# EAGLE board UBW32_MX460_v262_Panel (EAGLE 7.4.0), part 1 of 4
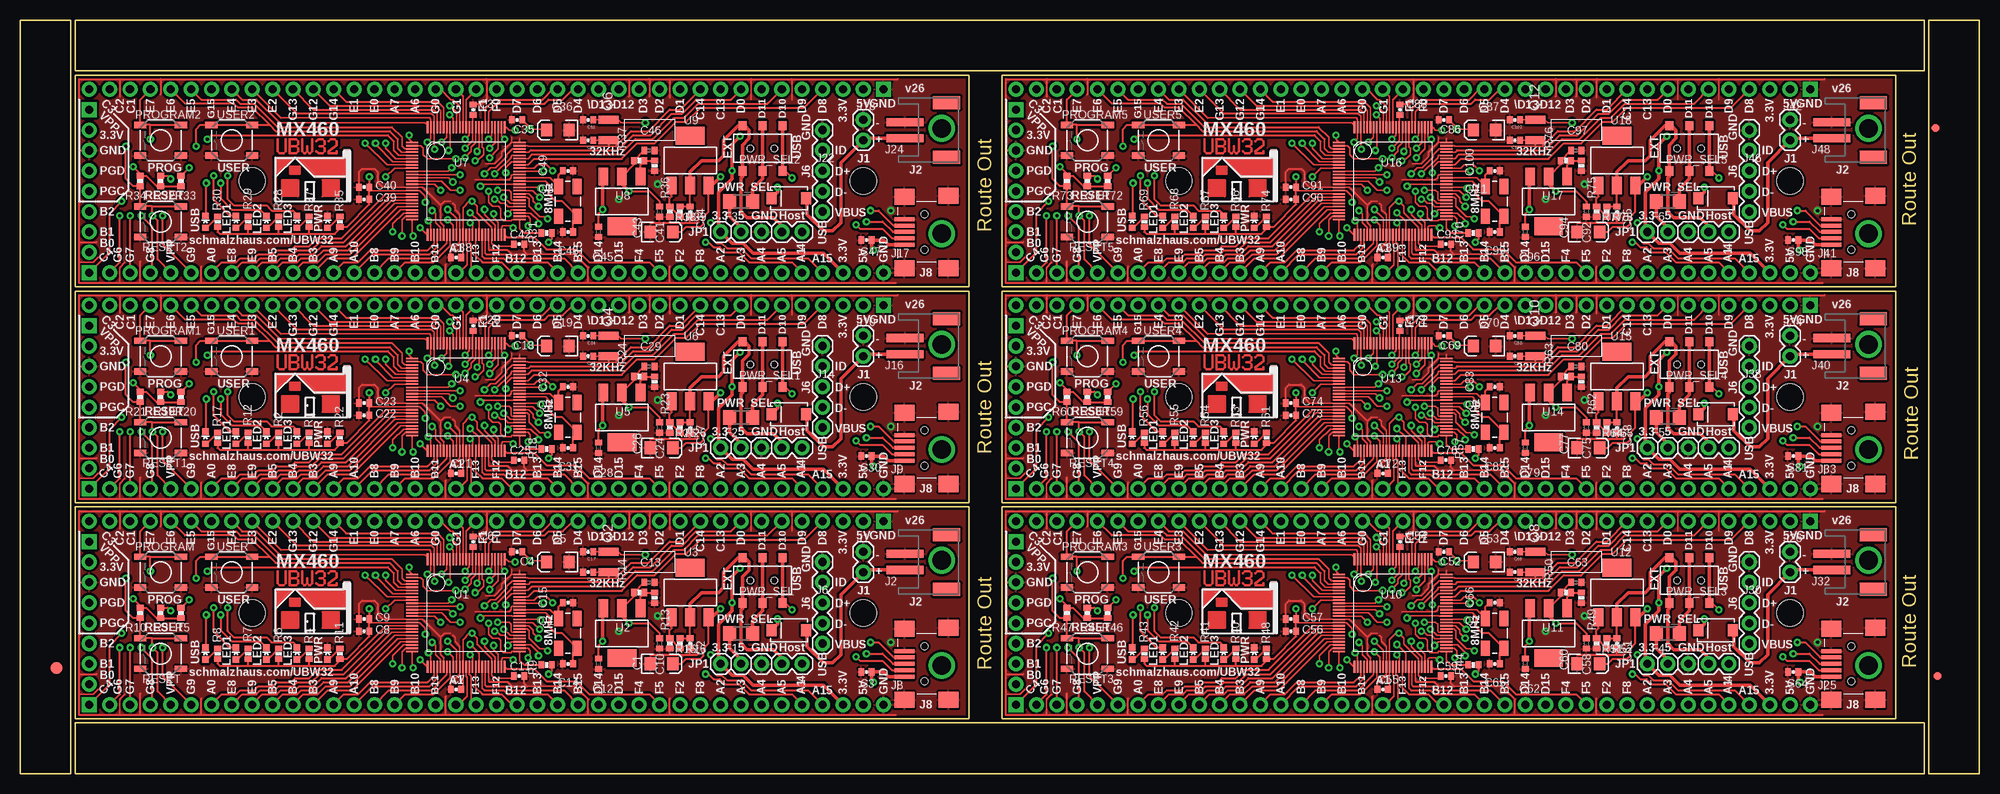
[diagram p0: board, top side]
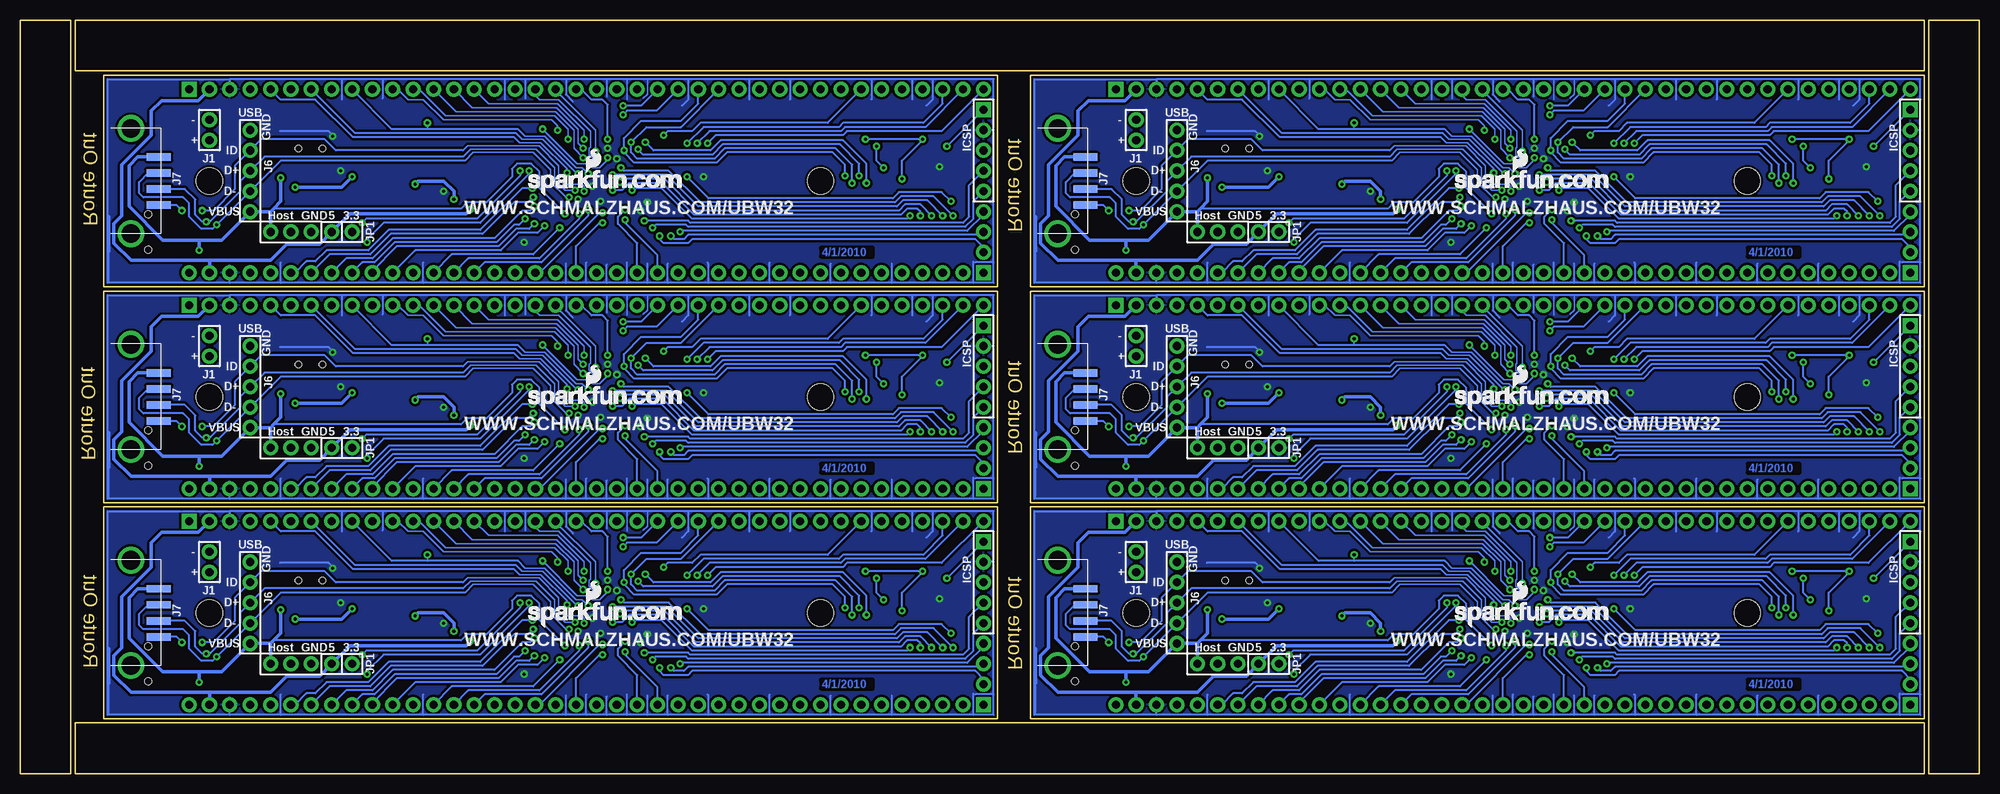
[diagram p1: board, bottom side, seen from below]

Size 244.35 x 93.98 mm. Coordinates in mm from the lower left corner, seen from the top.
Outline: 6.35,79.25 6.35,0 0,0 0,29.72
Outline: 0,27.18 0,93.98 6.35,93.98 6.35,76.71
Outline: 79.25,0 6.86,0 6.86,6.35 29.72,6.35
Outline: 27.18,6.35 237.49,6.35 237.49,0 76.71,0
Outline: 244.35,79.25 244.35,0 238,0 238,29.72
Outline: 238,27.18 238,93.98 244.35,93.98 244.35,76.71
Outline: 165.1,93.98 237.49,93.98 237.49,87.63 214.63,87.63
Outline: 217.17,87.63 6.86,87.63 6.86,93.98 167.64,93.98
Outline: 6.86,33.27 118.36,33.27 118.36,6.86 6.86,6.86 6.86,33.27
Outline: 6.86,60.2 118.36,60.2 118.36,33.78 6.86,33.78 6.86,60.2
Outline: 6.86,87.12 118.36,87.12 118.36,60.71 6.86,60.71 6.86,87.12
Outline: 122.43,33.27 233.93,33.27 233.93,6.86 122.43,6.86 122.43,33.27
Outline: 122.43,60.2 233.93,60.2 233.93,33.78 122.43,33.78 122.43,60.2
Outline: 122.43,87.12 233.93,87.12 233.93,60.71 122.43,60.71 122.43,87.12
Copper layers (1*16): Top 0.035mm / dielectric 1.5mm / Bottom 0.035mm
Design rules "SparkFun *": minimum track width 8mil, minimum drill 15mil, track to track 8mil, track to pad 8mil, pad to pad 8mil, via to via 8mil, smd to smd 8mil, copper to edge 8mil, drill to drill 8mil, minimum pad ring 12mil, minimum via ring 10mil, stop-mask expansion 4mil, vias tented up to drill 20mil, thermal gap 10mil

## Footprints (pad centres in the part's own frame; a part is rotated, then mirrored left to right if it is on the bottom)
1X01 = drill 1.016 pad 1.88: 1 0,0
EIA3216 = smd 1.4 x 1.6: A 1.4,0; C -1.4,0
0402-CAP = smd 0.7 x 0.9: 1 -0.65,0; 2 0.65,0
C0402 = smd 0.7 x 0.9: 1 -0.65,0; 2 0.65,0
SMA-DIODE = smd 1.27 x 1.47: A -2.15,0; C 2.15,0
FIDUCIAL-1.5X3 = smd 1.5 x 1.5: 1 0,0
FIDUCIAL-1X2 = smd 1 x 1: 1 0,0
R1206 = smd 1.6 x 1.803: 1 -1.422,0; 2 1.422,0
1X02 = drill 1.016 pad 1.88: 1 0,0; 2 2.54,0
S2B-PH = smd 1 x 4.6: 1 -1,-3.7; 2 1,-3.7 | smd 1.6 x 3.4: NC1 -3.4,1.5; NC2 3.4,1.5
1X40 = drill 1.016 pad 1.88 square: 1 -49.53,0 | drill 1.016 pad 1.88: 2 -46.99,0; 3 -44.45,0; 4 -41.91,0; 5 -39.37,0; 6 -36.83,0; 7 -34.29,0; 8 -31.75,0; 9 -29.21,0; 10 -26.67,0; 11 -24.13,0; 12 -21.59,0; 13 -19.05,0; 14 -16.51,0; 15 -13.97,0; 16 -11.43,0; 17 -8.89,0; 18 -6.35,0; 19 -3.81,0; 20 -1.27,0; 21 1.27,0; 22 3.81,0; 23 6.35,0; 24 8.89,0; 25 11.43,0; 26 13.97,0; 27 16.51,0; 28 19.05,0; 29 21.59,0; 30 24.13,0; 31 26.67,0; 32 29.21,0; 33 31.75,0; 34 34.29,0; 35 36.83,0; 36 39.37,0; 37 41.91,0; 38 44.45,0; 39 46.99,0; 40 49.53,0
1X08 = drill 1.016 pad 1.88 square: 1 0,0 | drill 1.016 pad 1.88: 2 2.54,0; 3 5.08,0; 4 7.62,0; 5 10.16,0; 6 12.7,0; 7 15.24,0; 8 17.78,0
1X05 = drill 1.016 pad 1.88: 1 0,0; 2 2.54,0; 3 5.08,0; 4 7.62,0; 5 10.16,0
USB-A-S = smd 3 x 0.9: D+ 3.45,-1; D- 3.45,1; GND 3.45,-3; VBUS 3.45,3 | drill 2.311: P$5 0,-6.566; P$6 0,6.566
USB-MINIB = smd 2.5 x 0.5: D+ 2.5,0; D- 2.5,0.8; GND 2.5,-1.6; ID 2.5,-0.8; VBUS 2.5,1.6 | smd 2.5 x 2: G1 -3,4.5; G2 2.5,4.5; G3 -3,-4.5; G4 2.5,-4.4 | hole 0.9: 0,2.2; 0,-2.2
LED-0603 = smd 0.8 x 0.8: A 0,-0.75; C 0,0.75
TACTILE_SWITCH_SMD = smd 1.524 x 0.762: 1 -2.54,1.905; 2 2.54,1.905; 3 -2.54,-1.905; 4 2.54,-1.905
AYZ0202 = smd 1 x 1.15: 1 -2.5,2.825; 2 0,2.825; 3 2.5,2.825; 4 -2.5,-2.825; 5 0,-2.825; 6 2.5,-2.825 | hole 0.85: 1.5,0; -1.5,0
CRYSTAL-SMD-5X3 = smd 1.9 x 1.1: 1 -1.85,-1.15; 2 1.85,-1.15; 3 1.85,1.15; 4 -1.85,1.15
CRYSTAL-32KHZ-SMD = smd 1 x 2.5: X1 -1.27,0; X2 1.27,0
0402-RES = smd 0.7 x 0.9: 1 -0.65,0; 2 0.65,0
TQFP100 = smd 0.2 x 1.5: 1 -4.8,-6.7; 2 -4.4,-6.7; 3 -4,-6.7; 4 -3.6,-6.7; 5 -3.2,-6.7; 6 -2.8,-6.7; 7 -2.4,-6.7; 8 -2,-6.7; 9 -1.6,-6.7; 10 -1.2,-6.7; 11 -0.8,-6.7; 12 -0.4,-6.7; 13 0,-6.7; 14 0.4,-6.7; 15 0.8,-6.7; 16 1.2,-6.7; 17 1.6,-6.7; 18 2,-6.7; 19 2.4,-6.7; 20 2.8,-6.7; 21 3.2,-6.7; 22 3.6,-6.7; 23 4,-6.7; 24 4.4,-6.7; 25 4.8,-6.7; 51 4.8,6.7; 52 4.4,6.7; 53 4,6.7; 54 3.6,6.7; 55 3.2,6.7; 56 2.8,6.7; 57 2.4,6.7; 58 2,6.7; 59 1.6,6.7; 60 1.2,6.7; 61 0.8,6.7; 62 0.4,6.7; 63 0,6.7; 64 -0.4,6.7; 65 -0.8,6.7; 66 -1.2,6.7; 67 -1.6,6.7; 68 -2,6.7; 69 -2.4,6.7; 70 -2.8,6.7; 71 -3.2,6.7; 72 -3.6,6.7; 73 -4,6.7; 74 -4.4,6.7; 75 -4.8,6.7 | smd 1.5 x 0.2: 26 6.7,-4.8; 27 6.7,-4.4; 28 6.7,-4; 29 6.7,-3.6; 30 6.7,-3.2; 31 6.7,-2.8; 32 6.7,-2.4; 33 6.7,-2; 34 6.7,-1.6; 35 6.7,-1.2; 36 6.7,-0.8; 37 6.7,-0.4; 38 6.7,0; 39 6.7,0.4; 40 6.7,0.8; 41 6.7,1.2; 42 6.7,1.6; 43 6.7,2; 44 6.7,2.4; 45 6.7,2.8; 46 6.7,3.2; 47 6.7,3.6; 48 6.7,4; 49 6.7,4.4; 50 6.7,4.8; 76 -6.7,4.8; 77 -6.7,4.4; 78 -6.7,4; 79 -6.7,3.6; 80 -6.7,3.2; 81 -6.7,2.8; 82 -6.7,2.4; 83 -6.7,2; 84 -6.7,1.6; 85 -6.7,1.2; 86 -6.7,0.8; 87 -6.7,0.4; 88 -6.7,0; 89 -6.7,-0.4; 90 -6.7,-0.8; 91 -6.7,-1.2; 92 -6.7,-1.6; 93 -6.7,-2; 94 -6.7,-2.4; 95 -6.7,-2.8; 96 -6.7,-3.2; 97 -6.7,-3.6; 98 -6.7,-4; 99 -6.7,-4.4; 100 -6.7,-4.8
SOT223 = smd 1.219 x 2.235: 1 -2.311,-3.099; 2 0,-3.099; 3 2.311,-3.099 | smd 3.6 x 2.2: 4 0,3.099
STAND-OFF = hole 3.302: 0,0

## Placement (x,y rotation side)
1  M01PTH  [1X01]  89.92,40.64 0 top
2  M01PTH  [1X01]  89.92,67.56 0 top
3  M01PTH  [1X01]  205.49,13.72 0 top
3.1  M01PTH  [1X01]  87.38,40.64 0 top
3.2  M01PTH  [1X01]  87.38,67.56 0 top
3.3  M01PTH  [1X01]  87.38,13.72 0 top
3.4  M01PTH  [1X01]  202.95,13.72 0 top
3.5  M01PTH  [1X01]  202.95,40.64 0 top
3.6  M01PTH  [1X01]  202.95,67.56 0 top
4  M01PTH  [1X01]  205.49,40.64 0 top
5  M01PTH  [1X01]  89.92,13.72 0 top
6  M01PTH  [1X01]  205.49,67.56 0 top
C1  10uF  [EIA3216]  80.01,13.72 0 top
C2  1uF  [0402-CAP]  83.57,16.26 270 top
C3  1uF  [0402-CAP]  105.54,12.7 180 top
C4  0.1uF  [0402-CAP]  61.98,27.69 180 top
C5  10uF  [EIA3216]  67.06,26.42 180 top
C6  0.1uF  [0402-CAP]  56.52,28.96 90 top
C7  0.1uF  [0402-CAP]  54.36,10.54 180 top
C8  0.1uF  [0402-CAP]  42.93,17.78 180 top
C9  0.1uF  [0402-CAP]  42.93,19.3 180 top
C10  0.1uF  [C0402]  79.76,16.26 270 top
C11  0.1uF  [0402-CAP]  62.23,12.19 0 top
C12  1uF  [C0402]  72.14,13.72 270 top
C13  1uF  [C0402]  78.49,23.88 0 top
C14  18pF  [0402-CAP]  68.33,13.72 0 top
C15  18pF  [0402-CAP]  68.33,21.34 180 top
C16  11pf  [0402-CAP]  70.87,25.15 180 top
C17  11pf  [0402-CAP]  70.87,27.69 180 top
C18  0.1uF  [0402-CAP]  61.98,54.61 180 top
C19  10uF  [EIA3216]  67.06,53.34 180 top
C20  0.1uF  [0402-CAP]  56.52,55.88 90 top
C21  0.1uF  [0402-CAP]  54.36,37.47 180 top
C22  0.1uF  [0402-CAP]  42.93,44.7 180 top
C23  0.1uF  [0402-CAP]  42.93,46.23 180 top
C24  0.1uF  [C0402]  79.76,43.18 270 top
C25  0.1uF  [0402-CAP]  62.23,39.12 0 top
C26  10uF  [EIA3216]  80.01,40.64 0 top
C27  1uF  [0402-CAP]  83.57,43.18 270 top
C28  1uF  [C0402]  72.14,40.64 270 top
C29  1uF  [C0402]  78.49,50.8 0 top
C30  1uF  [0402-CAP]  105.54,39.62 180 top
C31  18pF  [0402-CAP]  68.33,40.64 0 top
C32  18pF  [0402-CAP]  68.33,48.26 180 top
C33  11pf  [0402-CAP]  70.87,52.07 180 top
C34  11pf  [0402-CAP]  70.87,54.61 180 top
C35  0.1uF  [0402-CAP]  61.98,81.53 180 top
C36  10uF  [EIA3216]  67.06,80.26 180 top
C37  0.1uF  [0402-CAP]  56.52,82.8 90 top
C38  0.1uF  [0402-CAP]  54.36,64.39 180 top
C39  0.1uF  [0402-CAP]  42.93,71.63 180 top
C40  0.1uF  [0402-CAP]  42.93,73.15 180 top
C41  0.1uF  [C0402]  79.76,70.1 270 top
C42  0.1uF  [0402-CAP]  62.23,66.04 0 top
C43  10uF  [EIA3216]  80.01,67.56 0 top
C44  1uF  [0402-CAP]  83.57,70.1 270 top
C45  1uF  [C0402]  72.14,67.56 270 top
C46  1uF  [C0402]  78.49,77.72 0 top
C47  1uF  [0402-CAP]  105.54,66.55 180 top
C48  18pF  [0402-CAP]  68.33,67.56 0 top
C49  18pF  [0402-CAP]  68.33,75.18 180 top
C50  11pf  [0402-CAP]  70.87,78.99 180 top
C51  11pf  [0402-CAP]  70.87,81.53 180 top
C52  0.1uF  [0402-CAP]  177.55,27.69 180 top
C53  10uF  [EIA3216]  182.63,26.42 180 top
C54  0.1uF  [0402-CAP]  172.09,28.96 90 top
C55  0.1uF  [0402-CAP]  169.93,10.54 180 top
C56  0.1uF  [0402-CAP]  158.5,17.78 180 top
C57  0.1uF  [0402-CAP]  158.5,19.3 180 top
C58  0.1uF  [C0402]  195.33,16.26 270 top
C59  0.1uF  [0402-CAP]  177.8,12.19 0 top
C60  10uF  [EIA3216]  195.58,13.72 0 top
C61  1uF  [0402-CAP]  199.14,16.26 270 top
C62  1uF  [C0402]  187.71,13.72 270 top
C63  1uF  [C0402]  194.06,23.88 0 top
C64  1uF  [0402-CAP]  221.11,12.7 180 top
C65  18pF  [0402-CAP]  183.9,13.72 0 top
C66  18pF  [0402-CAP]  183.9,21.34 180 top
C67  11pf  [0402-CAP]  186.44,25.15 180 top
C68  11pf  [0402-CAP]  186.44,27.69 180 top
C69  0.1uF  [0402-CAP]  177.55,54.61 180 top
C70  10uF  [EIA3216]  182.63,53.34 180 top
C71  0.1uF  [0402-CAP]  172.09,55.88 90 top
C72  0.1uF  [0402-CAP]  169.93,37.47 180 top
C73  0.1uF  [0402-CAP]  158.5,44.7 180 top
C74  0.1uF  [0402-CAP]  158.5,46.23 180 top
C75  0.1uF  [C0402]  195.33,43.18 270 top
C76  0.1uF  [0402-CAP]  177.8,39.12 0 top
C77  10uF  [EIA3216]  195.58,40.64 0 top
C78  1uF  [0402-CAP]  199.14,43.18 270 top
C79  1uF  [C0402]  187.71,40.64 270 top
C80  1uF  [C0402]  194.06,50.8 0 top
C81  1uF  [0402-CAP]  221.11,39.62 180 top
C82  18pF  [0402-CAP]  183.9,40.64 0 top
C83  18pF  [0402-CAP]  183.9,48.26 180 top
C84  11pf  [0402-CAP]  186.44,52.07 180 top
C85  11pf  [0402-CAP]  186.44,54.61 180 top
C86  0.1uF  [0402-CAP]  177.55,81.53 180 top
C87  10uF  [EIA3216]  182.63,80.26 180 top
C88  0.1uF  [0402-CAP]  172.09,82.8 90 top
C89  0.1uF  [0402-CAP]  169.93,64.39 180 top
C90  0.1uF  [0402-CAP]  158.5,71.63 180 top
C91  0.1uF  [0402-CAP]  158.5,73.15 180 top
C92  0.1uF  [C0402]  195.33,70.1 270 top
C93  0.1uF  [0402-CAP]  177.8,66.04 0 top
C94  10uF  [EIA3216]  195.58,67.56 0 top
C95  1uF  [0402-CAP]  199.14,70.1 270 top
C96  1uF  [C0402]  187.71,67.56 270 top
C97  1uF  [C0402]  194.06,77.72 0 top
C98  1uF  [0402-CAP]  221.11,66.55 180 top
C99  18pF  [0402-CAP]  183.9,67.56 0 top
C100  18pF  [0402-CAP]  183.9,75.18 180 top
C101  11pf  [0402-CAP]  186.44,78.99 180 top
C102  11pf  [0402-CAP]  186.44,81.53 180 top
D1  [SMA-DIODE]  95.89,17.91 180 top
D2  [SMA-DIODE]  95.89,44.83 180 top
D3  [SMA-DIODE]  95.89,71.75 180 top
D4  [SMA-DIODE]  211.46,17.91 180 top
D5  [SMA-DIODE]  211.46,44.83 180 top
D6  [SMA-DIODE]  211.46,71.75 180 top
E$1  [FIDUCIAL-1.5X3]  4.57,13.21 0 top
E$5  [FIDUCIAL-1X2]  239.14,12.19 0 top
E$6  [FIDUCIAL-1X2]  238.89,80.52 180 top
F1  250mA PTC Fuse  [R1206]  89.92,17.53 180 top
F2  250mA PTC Fuse  [R1206]  89.92,44.45 180 top
F3  250mA PTC Fuse  [R1206]  89.92,71.37 180 top
F4  250mA PTC Fuse  [R1206]  205.49,17.53 180 top
F5  250mA PTC Fuse  [R1206]  205.49,44.45 180 top
F6  250mA PTC Fuse  [R1206]  205.49,71.37 180 top
GND  M01PTH  [1X01]  92.46,13.72 0 top
GND1  M01PTH  [1X01]  92.46,40.64 0 top
GND2  M01PTH  [1X01]  92.46,67.56 0 top
GND3  M01PTH  [1X01]  208.03,13.72 0 top
GND4  M01PTH  [1X01]  208.03,40.64 0 top
GND5  M01PTH  [1X01]  208.03,67.56 0 top
J1  [1X02]  105.16,27.69 270 top
J2  [S2B-PH]  114.05,26.42 270 top
J3  M40  [1X40]  58.17,31.5 180 top
J4  M40  [1X40]  58.17,8.64 0 top
J5  [1X08]  8.64,28.96 270 top
J6  [1X05]  100.08,16.26 90 top
J7  USB-A-S  [USB-A-S]  114.94,20.07 0 bottom
J8  [USB-MINIB]  112.78,13.72 180 top
J9  [USB-MINIB]  112.78,40.64 180 top
J10  [1X02]  105.16,54.61 270 top
J11  M40  [1X40]  58.17,58.42 180 top
J12  M40  [1X40]  58.17,35.56 0 top
J13  [1X08]  8.64,55.88 270 top
J14  [1X05]  100.08,43.18 90 top
J15  USB-A-S  [USB-A-S]  114.94,46.99 0 bottom
J16  [S2B-PH]  114.05,53.34 270 top
J17  [USB-MINIB]  112.78,67.56 180 top
J18  [1X02]  105.16,81.53 270 top
J19  M40  [1X40]  58.17,85.34 180 top
J20  M40  [1X40]  58.17,62.48 0 top
J21  [1X08]  8.64,82.8 270 top
J22  [1X05]  100.08,70.1 90 top
J23  USB-A-S  [USB-A-S]  114.94,73.91 0 bottom
J24  [S2B-PH]  114.05,80.26 270 top
J25  [USB-MINIB]  228.35,13.72 180 top
J26  [1X02]  220.73,27.69 270 top
J27  M40  [1X40]  173.74,31.5 180 top
J28  M40  [1X40]  173.74,8.64 0 top
J29  [1X08]  124.21,28.96 270 top
J30  [1X05]  215.65,16.26 90 top
J31  USB-A-S  [USB-A-S]  230.5,20.07 0 bottom
J32  [S2B-PH]  229.62,26.42 270 top
J33  [USB-MINIB]  228.35,40.64 180 top
J34  [1X02]  220.73,54.61 270 top
J35  M40  [1X40]  173.74,58.42 180 top
J36  M40  [1X40]  173.74,35.56 0 top
J37  [1X08]  124.21,55.88 270 top
J38  [1X05]  215.65,43.18 90 top
J39  USB-A-S  [USB-A-S]  230.5,46.99 0 bottom
J40  [S2B-PH]  229.62,53.34 270 top
J41  [USB-MINIB]  228.35,67.56 180 top
J42  [1X02]  220.73,81.53 270 top
J43  M40  [1X40]  173.74,85.34 180 top
J44  M40  [1X40]  173.74,62.48 0 top
J45  [1X08]  124.21,82.8 270 top
J46  [1X05]  215.65,70.1 90 top
J47  USB-A-S  [USB-A-S]  230.5,73.91 0 bottom
J48  [S2B-PH]  229.62,80.26 270 top
JP1  [1X02]  95,13.72 0 top
JP2  [1X02]  95,40.64 0 top
JP3  [1X02]  95,67.56 0 top
JP4  [1X02]  210.57,13.72 0 top
JP5  [1X02]  210.57,40.64 0 top
JP6  [1X02]  210.57,67.56 0 top
LED1  WHITE  [LED-0603]  26.92,14.99 0 top
LED2  RED  [LED-0603]  30.73,14.99 0 top
LED3  YELLOW  [LED-0603]  34.54,14.99 0 top
LED4  YELLOW  [LED-0603]  34.54,41.91 0 top
LED5  RED  [LED-0603]  30.73,41.91 0 top
LED6  WHITE  [LED-0603]  26.92,41.91 0 top
LED7  YELLOW  [LED-0603]  34.54,68.83 0 top
LED8  RED  [LED-0603]  30.73,68.83 0 top
LED9  WHITE  [LED-0603]  26.92,68.83 0 top
LED10  YELLOW  [LED-0603]  150.11,14.99 0 top
LED11  RED  [LED-0603]  146.3,14.99 0 top
LED12  WHITE  [LED-0603]  142.49,14.99 0 top
LED13  YELLOW  [LED-0603]  150.11,41.91 0 top
LED14  RED  [LED-0603]  146.3,41.91 0 top
LED15  WHITE  [LED-0603]  142.49,41.91 0 top
LED16  YELLOW  [LED-0603]  150.11,68.83 0 top
LED17  RED  [LED-0603]  146.3,68.83 0 top
LED18  WHITE  [LED-0603]  142.49,68.83 0 top
PROGRAM  [TACTILE_SWITCH_SMD]  17.53,25.15 180 top
PROGRAM1  [TACTILE_SWITCH_SMD]  17.53,52.07 180 top
PROGRAM2  [TACTILE_SWITCH_SMD]  17.53,78.99 180 top
PROGRAM3  [TACTILE_SWITCH_SMD]  133.1,25.15 180 top
PROGRAM4  [TACTILE_SWITCH_SMD]  133.1,52.07 180 top
PROGRAM5  [TACTILE_SWITCH_SMD]  133.1,78.99 180 top
PWR  BLUE  [LED-0603]  38.35,14.99 0 top
PWR1  BLUE  [LED-0603]  38.35,41.91 0 top
PWR2  BLUE  [LED-0603]  38.35,68.83 0 top
PWR3  BLUE  [LED-0603]  153.92,14.99 0 top
PWR4  BLUE  [LED-0603]  153.92,41.91 0 top
PWR5  BLUE  [LED-0603]  153.92,68.83 0 top
PWR_SEL  AYZ0202  [AYZ0202]  92.58,24.13 0 top
PWR_SEL1  AYZ0202  [AYZ0202]  92.58,51.05 0 top
PWR_SEL2  AYZ0202  [AYZ0202]  92.58,77.98 0 top
PWR_SEL3  AYZ0202  [AYZ0202]  208.15,24.13 0 top
PWR_SEL4  AYZ0202  [AYZ0202]  208.15,51.05 0 top
PWR_SEL5  AYZ0202  [AYZ0202]  208.15,77.98 0 top
Q1  8MHz  [CRYSTAL-SMD-5X3]  68.33,17.53 90 top
Q2  32.768KHz  [CRYSTAL-32KHZ-SMD]  73.41,26.42 270 top
Q3  8MHz  [CRYSTAL-SMD-5X3]  68.33,44.45 90 top
Q4  32.768KHz  [CRYSTAL-32KHZ-SMD]  73.41,53.34 270 top
Q5  8MHz  [CRYSTAL-SMD-5X3]  68.33,71.37 90 top
Q6  32.768KHz  [CRYSTAL-32KHZ-SMD]  73.41,80.26 270 top
Q7  8MHz  [CRYSTAL-SMD-5X3]  183.9,17.53 90 top
Q8  32.768KHz  [CRYSTAL-32KHZ-SMD]  188.98,26.42 270 top
Q9  8MHz  [CRYSTAL-SMD-5X3]  183.9,44.45 90 top
Q10  32.768KHz  [CRYSTAL-32KHZ-SMD]  188.98,53.34 270 top
Q11  8MHz  [CRYSTAL-SMD-5X3]  183.9,71.37 90 top
Q12  32.768KHz  [CRYSTAL-32KHZ-SMD]  188.98,80.26 270 top
R1  330  [0402-RES]  36.07,41.91 270 top
R2  330  [0402-RES]  32.26,41.91 270 top
R3  10K  [0402-RES]  17.53,20.07 90 top
R4  330  [0402-RES]  36.07,14.99 270 top
R5  10K  [0402-RES]  20.07,20.07 90 top
R6  330  [0402-RES]  32.26,14.99 270 top
R7  330  [0402-RES]  28.45,14.99 270 top
R8  330  [0402-RES]  24.64,14.99 270 top
R9  10K  [0402-RES]  65.66,13.59 0 top
R10  10K  [0402-RES]  14.99,20.07 270 top
R11  330  [0402-RES]  39.88,14.99 270 top
R12  330  [0402-RES]  28.45,41.91 270 top
R13  390  [0402-RES]  79.12,21.97 90 top
R14  240  [0402-RES]  77.22,22.61 0 top
R15  715  [0402-RES]  81.03,16.26 90 top
R16  240  [0402-RES]  82.3,16.26 270 top
R17  330  [0402-RES]  24.64,41.91 270 top
R18  10K  [0402-RES]  65.66,40.51 0 top
R19  10K  [0402-RES]  17.53,46.99 90 top
R20  10K  [0402-RES]  20.07,46.99 90 top
R21  10K  [0402-RES]  14.99,46.99 270 top
R22  330  [0402-RES]  39.88,41.91 270 top
R23  390  [0402-RES]  79.12,48.9 90 top
R24  240  [0402-RES]  77.22,49.53 0 top
R25  715  [0402-RES]  81.03,43.18 90 top
R26  240  [0402-RES]  82.3,43.18 270 top
R27  330  [0402-RES]  36.07,68.83 270 top
R28  330  [0402-RES]  32.26,68.83 270 top
R29  330  [0402-RES]  28.45,68.83 270 top
R30  330  [0402-RES]  24.64,68.83 270 top
R31  10K  [0402-RES]  65.66,67.44 0 top
R32  10K  [0402-RES]  17.53,73.91 90 top
R33  10K  [0402-RES]  20.07,73.91 90 top
R34  10K  [0402-RES]  14.99,73.91 270 top
R35  330  [0402-RES]  39.88,68.83 270 top
R36  390  [0402-RES]  79.12,75.82 90 top
R37  240  [0402-RES]  77.22,76.45 0 top
R38  715  [0402-RES]  81.03,70.1 90 top
R39  240  [0402-RES]  82.3,70.1 270 top
R40  330  [0402-RES]  151.64,14.99 270 top
R41  330  [0402-RES]  147.83,14.99 270 top
R42  330  [0402-RES]  144.02,14.99 270 top
R43  330  [0402-RES]  140.21,14.99 270 top
R44  10K  [0402-RES]  181.23,13.59 0 top
R45  10K  [0402-RES]  133.1,20.07 90 top
R46  10K  [0402-RES]  135.64,20.07 90 top
R47  10K  [0402-RES]  130.56,20.07 270 top
R48  330  [0402-RES]  155.45,14.99 270 top
R49  390  [0402-RES]  194.69,21.97 90 top
R50  240  [0402-RES]  192.79,22.61 0 top
R51  715  [0402-RES]  196.6,16.26 90 top
R52  240  [0402-RES]  197.87,16.26 270 top
R53  330  [0402-RES]  151.64,41.91 270 top
R54  330  [0402-RES]  147.83,41.91 270 top
R55  330  [0402-RES]  144.02,41.91 270 top
R56  330  [0402-RES]  140.21,41.91 270 top
R57  10K  [0402-RES]  181.23,40.51 0 top
R58  10K  [0402-RES]  133.1,46.99 90 top
R59  10K  [0402-RES]  135.64,46.99 90 top
R60  10K  [0402-RES]  130.56,46.99 270 top
R61  330  [0402-RES]  155.45,41.91 270 top
R62  390  [0402-RES]  194.69,48.9 90 top
R63  240  [0402-RES]  192.79,49.53 0 top
R64  715  [0402-RES]  196.6,43.18 90 top
R65  240  [0402-RES]  197.87,43.18 270 top
R66  330  [0402-RES]  151.64,68.83 270 top
R67  330  [0402-RES]  147.83,68.83 270 top
R68  330  [0402-RES]  144.02,68.83 270 top
R69  330  [0402-RES]  140.21,68.83 270 top
R70  10K  [0402-RES]  181.23,67.44 0 top
R71  10K  [0402-RES]  133.1,73.91 90 top
R72  10K  [0402-RES]  135.64,73.91 90 top
R73  10K  [0402-RES]  130.56,73.91 270 top
R74  330  [0402-RES]  155.45,68.83 270 top
R75  390  [0402-RES]  194.69,75.82 90 top
R76  240  [0402-RES]  192.79,76.45 0 top
R77  715  [0402-RES]  196.6,70.1 90 top
R78  240  [0402-RES]  197.87,70.1 270 top
RESET  [TACTILE_SWITCH_SMD]  17.53,14.99 180 top
RESET1  [TACTILE_SWITCH_SMD]  17.53,41.91 180 top
RESET2  [TACTILE_SWITCH_SMD]  17.53,68.83 180 top
RESET3  [TACTILE_SWITCH_SMD]  133.1,14.99 180 top
RESET4  [TACTILE_SWITCH_SMD]  133.1,41.91 180 top
RESET5  [TACTILE_SWITCH_SMD]  133.1,68.83 180 top
U1  PIC32MX460F512L TQFP100  [TQFP100]  55.63,20.07 270 top
U2  3.3V  [SOT223]  75.06,17.53 180 top
U3  5V  [SOT223]  83.57,22.61 0 top
U4  PIC32MX460F512L TQFP100  [TQFP100]  55.63,46.99 270 top
U5  3.3V  [SOT223]  75.06,44.45 180 top
U6  5V  [SOT223]  83.57,49.53 0 top
U7  PIC32MX460F512L TQFP100  [TQFP100]  55.63,73.91 270 top
U8  3.3V  [SOT223]  75.06,71.37 180 top
U9  5V  [SOT223]  83.57,76.45 0 top
U10  PIC32MX460F512L TQFP100  [TQFP100]  171.2,20.07 270 top
U11  3.3V  [SOT223]  190.63,17.53 180 top
U12  5V  [SOT223]  199.14,22.61 0 top
U13  PIC32MX460F512L TQFP100  [TQFP100]  171.2,46.99 270 top
U14  3.3V  [SOT223]  190.63,44.45 180 top
U15  5V  [SOT223]  199.14,49.53 0 top
U16  PIC32MX460F512L TQFP100  [TQFP100]  171.2,73.91 270 top
U17  3.3V  [SOT223]  190.63,71.37 180 top
U18  5V  [SOT223]  199.14,76.45 0 top
U$1  STAND-OFF  [STAND-OFF]  105.16,46.99 0 top
U$2  STAND-OFF  [STAND-OFF]  28.96,46.99 0 top
U$3  [UBW32]  36.45,24.77 0 top
U$4  LOGO-SFENEW  [SFE-NEW-WEBLOGO]  65.41,18.29 0 bottom
U$5  [SCHMALZHAUS]  35.69,20.07 0 top
U$6  STAND-OFF  [STAND-OFF]  105.16,20.07 0 top
U$7  STAND-OFF  [STAND-OFF]  28.96,20.07 0 top
U$8  LOGO-SFENEW  [SFE-NEW-WEBLOGO]  65.41,45.21 0 bottom
U$9  [UBW32]  36.45,51.69 0 top
U$10  [SCHMALZHAUS]  35.69,46.99 0 top
U$11  STAND-OFF  [STAND-OFF]  105.16,73.91 0 top
U$12  STAND-OFF  [STAND-OFF]  28.96,73.91 0 top
U$13  LOGO-SFENEW  [SFE-NEW-WEBLOGO]  65.41,72.14 0 bottom
U$14  [UBW32]  36.45,78.61 0 top
U$15  [SCHMALZHAUS]  35.69,73.91 0 top
U$16  STAND-OFF  [STAND-OFF]  220.73,20.07 0 top
U$17  STAND-OFF  [STAND-OFF]  144.53,20.07 0 top
U$18  LOGO-SFENEW  [SFE-NEW-WEBLOGO]  180.97,18.29 0 bottom
U$19  [UBW32]  152.02,24.77 0 top
U$20  [SCHMALZHAUS]  151.26,20.07 0 top
U$21  STAND-OFF  [STAND-OFF]  220.73,46.99 0 top
U$22  STAND-OFF  [STAND-OFF]  144.53,46.99 0 top
U$23  LOGO-SFENEW  [SFE-NEW-WEBLOGO]  180.97,45.21 0 bottom
U$24  [UBW32]  152.02,51.69 0 top
U$25  [SCHMALZHAUS]  151.26,46.99 0 top
U$26  STAND-OFF  [STAND-OFF]  220.73,73.91 0 top
U$27  STAND-OFF  [STAND-OFF]  144.53,73.91 0 top
U$28  LOGO-SFENEW  [SFE-NEW-WEBLOGO]  180.97,72.14 0 bottom
U$29  [UBW32]  152.02,78.61 0 top
U$30  [SCHMALZHAUS]  151.26,73.91 0 top
USB  GREEN  [LED-0603]  23.11,14.99 0 top
USB1  GREEN  [LED-0603]  23.11,41.91 0 top
USB2  GREEN  [LED-0603]  23.11,68.83 0 top
USB3  GREEN  [LED-0603]  138.68,14.99 0 top
USB4  GREEN  [LED-0603]  138.68,41.91 0 top
USB5  GREEN  [LED-0603]  138.68,68.83 0 top
USER  [TACTILE_SWITCH_SMD]  26.42,25.15 180 top
USER1  [TACTILE_SWITCH_SMD]  26.42,52.07 180 top
USER2  [TACTILE_SWITCH_SMD]  26.42,78.99 180 top
USER3  [TACTILE_SWITCH_SMD]  141.99,25.15 180 top
USER4  [TACTILE_SWITCH_SMD]  141.99,52.07 180 top
USER5  [TACTILE_SWITCH_SMD]  141.99,78.99 180 top

## Library data of the parts
1-3 3.1-3.6 4-6 D1-D6 GND GND1-GND5 J1 J6 J10 J14 J18 J22 J26 J30 J34 J38 J42 J46 JP1-JP6 = SparkFun-12-01-09
C1 C5 C10 C12 C13 C19 C24 C26 C28 C29 C36 C41 C43 C45 C46 C53 C58 C60 C62 C63 C70 C75 C77 C79 C80 C87 C92 C94 C96 C97 J7-J9 J15 J17 J23 J25 J31 J33 J39 J41 J47 PROGRAM PROGRAM1-PROGRAM5 PWR_SEL PWR_SEL1-PWR_SEL5 RESET RESET1-RESET5 U$1 U$2 U$4 U$6-U$8 U$11-U$13 U$16-U$18 U$21-U$23 U$26-U$28 USER USER1-USER5 = SparkFun02-20-08
C2-C4 C6-C9 C11 C14-C18 C20-C23 C25 C27 C30-C35 C37-C40 C42 C44 C47-C52 C54-C57 C59 C61 C64-C69 C71-C74 C76 C78 C81-C86 C88-C91 C93 C95 C98-C102 J2 J16 J24 J32 J40 J48 LED1-LED18 PWR PWR1-PWR5 R1-R78 U2 U3 U5 U6 U8 U9 U11 U12 U14 U15 U17 U18 USB USB1-USB5 = SparkFun
E$1 = SparkFun-Retired
E$5 E$6 = SparkFun-Aesthetics
F1-F6 = resistor
J3-J5 J11-J13 J19-J21 J27-J29 J35-J37 J43-J45 Q2 Q4 Q6 Q8 Q10 Q12 U1 U4 U7 U10 U13 U16 = SchmalzHaus
Q1 Q3 Q5 Q7 Q9 Q11 = SparkFun11_03_09
U$3 U$5 U$9 U$10 U$14 U$15 U$19 U$20 U$24 U$25 U$29 U$30 = UBW32

## Nets
3.3V: 3.3.1 C6.1 C7.1 C8.1 C9.1 C10.1 C11.1 C13.1 J3.3 J4.38 J5.2 R3.1 R4.2 R5.1 R6.2 R7.2 R8.2 R9.2 R10.1 R11.2 R14.1 U1.2 U1.16 U1.30 U1.37 U1.46 U1.55 U1.62 U1.86 U2.2
3.3V1: 3.1.1 C20.1 C21.1 C22.1 C23.1 C24.1 C25.1 C29.1 J11.3 J12.38 J13.2 R1.2 R2.2 R12.2 R17.2 R18.2 R19.1 R20.1 R21.1 R22.2 R24.1 U4.2 U4.16 U4.30 U4.37 U4.46 U4.55 U4.62 U4.86 U5.2
3.3V2: 3.2.1 C37.1 C38.1 C39.1 C40.1 C41.1 C42.1 C46.1 J19.3 J20.38 J21.2 R27.2 R28.2 R29.2 R30.2 R31.2 R32.1 R33.1 R34.1 R35.2 R37.1 U7.2 U7.16 U7.30 U7.37 U7.46 U7.55 U7.62 U7.86 U8.2
3.3V3: 3.4.1 C54.1 C55.1 C56.1 C57.1 C58.1 C59.1 C63.1 J27.3 J28.38 J29.2 R40.2 R41.2 R42.2 R43.2 R44.2 R45.1 R46.1 R47.1 R48.2 R50.1 U10.2 U10.16 U10.30 U10.37 U10.46 U10.55 U10.62 U10.86 U11.2
3.3V4: 3.5.1 C71.1 C72.1 C73.1 C74.1 C75.1 C76.1 C80.1 J35.3 J36.38 J37.2 R53.2 R54.2 R55.2 R56.2 R57.2 R58.1 R59.1 R60.1 R61.2 R63.1 U13.2 U13.16 U13.30 U13.37 U13.46 U13.55 U13.62 U13.86 U14.2
3.3V5: 3.6.1 C88.1 C89.1 C90.1 C91.1 C92.1 C93.1 C97.1 J43.3 J44.38 J45.2 R66.2 R67.2 R68.2 R69.2 R70.2 R71.1 R72.1 R73.1 R74.2 R76.1 U16.2 U16.16 U16.30 U16.37 U16.46 U16.55 U16.62 U16.86 U17.2
5V: 5.1 C12.1 F1.2 J3.2 J4.39 U2.3
5V1: 1.1 C28.1 F2.2 J11.2 J12.39 U5.3
5V2: 2.1 C45.1 F3.2 J19.2 J20.39 U8.3
5V3: 3.1 C62.1 F4.2 J27.2 J28.39 U11.3
5V4: 4.1 C79.1 F5.2 J35.2 J36.39 U14.3
5V5: 6.1 C96.1 F6.2 J43.2 J44.39 U17.3
5V_ALT: C2.1 JP1.1 PWR_SEL.1 PWR_SEL.4 R16.1 U3.2
5V_ALT1: C27.1 JP2.1 PWR_SEL1.1 PWR_SEL1.4 R26.1 U6.2
5V_ALT2: C44.1 JP3.1 PWR_SEL2.1 PWR_SEL2.4 R39.1 U9.2
5V_ALT3: C61.1 JP4.1 PWR_SEL3.1 PWR_SEL3.4 R52.1 U12.2
5V_ALT4: C78.1 JP5.1 PWR_SEL4.1 PWR_SEL4.4 R65.1 U15.2
5V_ALT5: C95.1 JP6.1 PWR_SEL5.1 PWR_SEL5.4 R78.1 U18.2
D+: J6.3 J7.D+ J8.D+ U1.57
D+1: J9.D+ J14.3 J15.D+ U4.57
D+2: J17.D+ J22.3 J23.D+ U7.57
D+3: J25.D+ J30.3 J31.D+ U10.57
D+4: J33.D+ J38.3 J39.D+ U13.57
D+5: J41.D+ J46.3 J47.D+ U16.57
D-: J6.2 J7.D- J8.D- U1.56
D-1: J9.D- J14.2 J15.D- U4.56
D-2: J17.D- J22.2 J23.D- U7.56
D-3: J25.D- J30.2 J31.D- U10.56
D-4: J33.D- J38.2 J39.D- U13.56
D-5: J41.D- J46.2 J47.D- U16.56
GND: C1.C C2.2 C3.2 C4.2 C5.C C6.2 C7.2 C8.2 C9.2 C10.2 C11.2 C12.2 C13.2 C14.1 C15.1 C16.2 C17.2 GND.1 J1.1 J2.1 J3.1 J4.40 J5.3 J6.5 J7.GND J8.G1 J8.G2 J8.G3 J8.G4 J8.GND PROGRAM.1 PROGRAM.2 PWR.C R13.1 R15.1 RESET.1 RESET.2 U1.15 U1.31 U1.36 U1.45 U1.65 U1.75 USER.1 USER.2
GND1: C18.2 C19.C C20.2 C21.2 C22.2 C23.2 C24.2 C25.2 C26.C C27.2 C28.2 C29.2 C30.2 C31.1 C32.1 C33.2 C34.2 GND1.1 J9.G1 J9.G2 J9.G3 J9.G4 J9.GND J10.1 J11.1 J12.40 J13.3 J14.5 J15.GND J16.1 PROGRAM1.1 PROGRAM1.2 PWR1.C R23.1 R25.1 RESET1.1 RESET1.2 U4.15 U4.31 U4.36 U4.45 U4.65 U4.75 USER1.1 USER1.2
GND2: C35.2 C36.C C37.2 C38.2 C39.2 C40.2 C41.2 C42.2 C43.C C44.2 C45.2 C46.2 C47.2 C48.1 C49.1 C50.2 C51.2 GND2.1 J17.G1 J17.G2 J17.G3 J17.G4 J17.GND J18.1 J19.1 J20.40 J21.3 J22.5 J23.GND J24.1 PROGRAM2.1 PROGRAM2.2 PWR2.C R36.1 R38.1 RESET2.1 RESET2.2 U7.15 U7.31 U7.36 U7.45 U7.65 U7.75 USER2.1 USER2.2
GND3: C52.2 C53.C C54.2 C55.2 C56.2 C57.2 C58.2 C59.2 C60.C C61.2 C62.2 C63.2 C64.2 C65.1 C66.1 C67.2 C68.2 GND3.1 J25.G1 J25.G2 J25.G3 J25.G4 J25.GND J26.1 J27.1 J28.40 J29.3 J30.5 J31.GND J32.1 PROGRAM3.1 PROGRAM3.2 PWR3.C R49.1 R51.1 RESET3.1 RESET3.2 U10.15 U10.31 U10.36 U10.45 U10.65 U10.75 USER3.1 USER3.2
GND4: C69.2 C70.C C71.2 C72.2 C73.2 C74.2 C75.2 C76.2 C77.C C78.2 C79.2 C80.2 C81.2 C82.1 C83.1 C84.2 C85.2 GND4.1 J33.G1 J33.G2 J33.G3 J33.G4 J33.GND J34.1 J35.1 J36.40 J37.3 J38.5 J39.GND J40.1 PROGRAM4.1 PROGRAM4.2 PWR4.C R62.1 R64.1 RESET4.1 RESET4.2 U13.15 U13.31 U13.36 U13.45 U13.65 U13.75 USER4.1 USER4.2
GND5: C86.2 C87.C C88.2 C89.2 C90.2 C91.2 C92.2 C93.2 C94.C C95.2 C96.2 C97.2 C98.2 C99.1 C100.1 C101.2 C102.2 GND5.1 J41.G1 J41.G2 J41.G3 J41.G4 J41.GND J42.1 J43.1 J44.40 J45.3 J46.5 J47.GND J48.1 PROGRAM5.1 PROGRAM5.2 PWR5.C R75.1 R77.1 RESET5.1 RESET5.2 U16.15 U16.31 U16.36 U16.45 U16.65 U16.75 USER5.1 USER5.2
N$1: D1.A J1.2 J2.2
N$2: F1.1 PWR_SEL.2 PWR_SEL.5
N$3: R13.2 R14.2 U2.1
N$4: R15.2 R16.2 U3.1
N$5: C18.1 C19.A U4.85
N$6: PWR.A R11.1
N$7: R17.1 USB1.A
N$8: LED6.A R12.1
N$9: LED5.A R2.1
N$10: LED4.A R1.1
N$11: PWR1.A R22.1
N$12: D2.A J10.2 J16.2
N$13: F2.1 PWR_SEL1.2 PWR_SEL1.5
N$14: R23.2 R24.2 U5.1
N$15: R25.2 R26.2 U6.1
N$16: C35.1 C36.A U7.85
N$17: R30.1 USB2.A
N$18: LED9.A R29.1
N$19: LED8.A R28.1
N$20: R8.1 USB.A
N$21: LED7.A R27.1
N$22: LED1.A R7.1
N$23: LED2.A R6.1
N$24: PWR2.A R35.1
N$25: D3.A J18.2 J24.2
N$26: F3.1 PWR_SEL2.2 PWR_SEL2.5
N$27: R36.2 R37.2 U8.1
N$28: R38.2 R39.2 U9.1
N$29: C52.1 C53.A U10.85
N$30: R43.1 USB3.A
N$31: LED12.A R42.1
N$32: LED11.A R41.1
N$33: LED10.A R40.1
N$34: PWR3.A R48.1
N$35: LED3.A R4.1
N$36: D4.A J26.2 J32.2
N$37: F4.1 PWR_SEL3.2 PWR_SEL3.5
N$38: R49.2 R50.2 U11.1
N$39: R51.2 R52.2 U12.1
N$40: C69.1 C70.A U13.85
N$41: R56.1 USB4.A
N$42: LED15.A R55.1
N$43: LED14.A R54.1
N$44: LED13.A R53.1
N$45: PWR4.A R61.1
N$46: D5.A J34.2 J40.2
N$47: F5.1 PWR_SEL4.2 PWR_SEL4.5
N$48: R62.2 R63.2 U14.1
N$49: R64.2 R65.2 U15.1
N$50: C86.1 C87.A U16.85
N$51: R69.1 USB5.A
N$52: LED18.A R68.1
N$53: LED17.A R67.1
N$54: LED16.A R66.1
N$55: PWR5.A R74.1
N$56: D6.A J42.2 J48.2
N$57: F6.1 PWR_SEL5.2 PWR_SEL5.5
N$58: R75.2 R76.2 U17.1
N$59: R77.2 R78.2 U18.1
N$110: C4.1 C5.A U1.85
OSC1: C14.2 Q1.1 U1.63
OSC2: C15.2 Q1.3 U1.64
OSC3: C32.2 Q3.3 U4.64
OSC4: C31.2 Q3.1 U4.63
OSC5: C49.2 Q5.3 U7.64
OSC6: C48.2 Q5.1 U7.63
OSC7: C66.2 Q7.3 U10.64
OSC8: C65.2 Q7.1 U10.63
OSC9: C83.2 Q9.3 U13.64
OSC10: C82.2 Q9.1 U13.63
OSC11: C100.2 Q11.3 U16.64
OSC12: C99.2 Q11.1 U16.63
PGC: J5.5 U1.26
PGC1: J13.5 U4.26
PGC2: J21.5 U7.26
PGC3: J29.5 U10.26
PGC4: J37.5 U13.26
PGC5: J45.5 U16.26
PGD: J5.4 U1.27
PGD1: J13.4 U4.27
PGD2: J21.4 U7.27
PGD3: J29.4 U10.27
PGD4: J37.4 U13.27
PGD5: J45.4 U16.27
RA0: J4.7 U1.17
RA1: J4.19 U1.38
RA2: J4.32 U1.58
RA3: J4.33 U1.59
RA4: J4.34 U1.60
RA5: J4.35 U1.61
RA6: J3.24 U1.91
RA7: J3.25 U1.92
RA8: J12.32 U4.58
RA9: J4.13 U1.28
RA10: J4.14 U1.29
RA11: J12.33 U4.59
RA12: J11.24 U4.91
RA13: J11.25 U4.92
RA14: J4.36 U1.66
RA15: J4.37 U1.67
RA16: J12.34 U4.60
RA17: J12.35 U4.61
RA18: J12.7 U4.17
RA19: J12.13 U4.28
RA20: J12.14 U4.29
RA21: J12.19 U4.38
RA22: J12.36 U4.66
RA23: J12.37 U4.67
RA24: J20.32 U7.58
RA25: J20.33 U7.59
RA26: J19.24 U7.91
RA27: J19.25 U7.92
RA28: J20.34 U7.60
RA29: J20.35 U7.61
RA30: J20.7 U7.17
RA31: J20.13 U7.28
RA32: J20.14 U7.29
RA33: J20.19 U7.38
RA34: J20.36 U7.66
RA35: J20.37 U7.67
RA36: J28.32 U10.58
RA37: J28.33 U10.59
RA38: J27.24 U10.91
RA39: J27.25 U10.92
RA40: J28.34 U10.60
RA41: J28.35 U10.61
RA42: J28.7 U10.17
RA43: J28.13 U10.28
RA44: J28.14 U10.29
RA45: J28.19 U10.38
RA46: J28.36 U10.66
RA47: J28.37 U10.67
RA48: J36.32 U13.58
RA49: J36.33 U13.59
RA50: J35.24 U13.91
RA51: J35.25 U13.92
RA52: J36.34 U13.60
RA53: J36.35 U13.61
RA54: J36.7 U13.17
RA55: J36.13 U13.28
RA56: J36.14 U13.29
RA57: J36.19 U13.38
RA58: J36.36 U13.66
RA59: J36.37 U13.67
RA60: J44.32 U16.58
RA61: J44.33 U16.59
RA62: J43.24 U16.91
RA63: J43.25 U16.92
RA64: J44.34 U16.60
RA65: J44.35 U16.61
RA66: J44.7 U16.17
RA67: J44.13 U16.28
RA68: J44.14 U16.29
RA69: J44.19 U16.38
RA70: J44.36 U16.66
RA71: J44.37 U16.67
RB0: J5.8 U1.25
RB1: J5.7 U1.24
RB2: J5.6 U1.23
RB3: J4.12 U1.22
RB4: J4.11 U1.21
RB5: J4.10 U1.20
RB6: J13.8 U4.25
RB7: J13.7 U4.24
RB8: J4.15 U1.32
RB9: J4.16 U1.33
RB10: J4.17 U1.34
RB11: J4.18 U1.35
RB12: J4.22 U1.41
RB13: J4.23 U1.42
RB14: J4.24 U1.43
RB15: J4.25 U1.44
RB16: J12.10 U4.20
RB17: J12.11 U4.21
RB18: J12.12 U4.22
RB19: J13.6 U4.23
RB20: J12.15 U4.32
RB21: J12.16 U4.33
RB22: J12.17 U4.34
RB23: J12.18 U4.35
RB24: J12.22 U4.41
RB25: J12.23 U4.42
RB26: J12.24 U4.43
RB27: J12.25 U4.44
RB28: J21.8 U7.25
RB29: J21.7 U7.24
RB30: J20.10 U7.20
RB31: J20.11 U7.21
RB32: J20.12 U7.22
RB33: J21.6 U7.23
RB34: J20.15 U7.32
RB35: J20.16 U7.33
RB36: J20.17 U7.34
RB37: J20.18 U7.35
RB38: J20.22 U7.41
RB39: J20.23 U7.42
RB40: J20.24 U7.43
RB41: J20.25 U7.44
RB42: J29.8 U10.25
RB43: J29.7 U10.24
RB44: J28.10 U10.20
RB45: J28.11 U10.21
RB46: J28.12 U10.22
RB47: J29.6 U10.23
RB48: J28.15 U10.32
RB49: J28.16 U10.33
RB50: J28.17 U10.34
RB51: J28.18 U10.35
RB52: J28.22 U10.41
RB53: J28.23 U10.42
RB54: J28.24 U10.43
RB55: J28.25 U10.44
RB56: J37.8 U13.25
RB57: J37.7 U13.24
RB58: J36.10 U13.20
RB59: J36.11 U13.21
RB60: J36.12 U13.22
RB61: J37.6 U13.23
RB62: J36.15 U13.32
RB63: J36.16 U13.33
RB64: J36.17 U13.34
RB65: J36.18 U13.35
RB66: J36.22 U13.41
RB67: J36.23 U13.42
RB68: J36.24 U13.43
RB69: J36.25 U13.44
RB70: J45.8 U16.25
RB71: J45.7 U16.24
RB72: J44.10 U16.20
RB73: J44.11 U16.21
RB74: J44.12 U16.22
RB75: J45.6 U16.23
RB76: J44.15 U16.32
RB77: J44.16 U16.33
RB78: J44.17 U16.34
RB79: J44.18 U16.35
RB80: J44.22 U16.41
RB81: J44.23 U16.42
RB82: J44.24 U16.43
RB83: J44.25 U16.44
RC1: J3.38 U1.6
RC2: J3.39 U1.7
RC3: J3.40 U1.8
RC4: J4.1 U1.9
RC5: J11.38 U4.6
RC6: J11.39 U4.7
RC7: J11.40 U4.8
RC8: J12.1 U4.9
RC9: C34.1 J11.9 Q4.X1 U4.73
RC10: C33.1 J11.10 Q4.X2 U4.74
RC11: J19.38 U7.6
RC12: J19.39 U7.7
RC13: C17.1 J3.9 Q2.X1 U1.73
RC14: C16.1 J3.10 Q2.X2 U1.74
RC15: J19.40 U7.8
RC16: J20.1 U7.9
RC17: C51.1 J19.9 Q6.X1 U7.73
RC18: C50.1 J19.10 Q6.X2 U7.74
RC19: J27.38 U10.6
RC20: J27.39 U10.7
RC21: J27.40 U10.8
RC22: J28.1 U10.9
RC23: C68.1 J27.9 Q8.X1 U10.73
RC24: C67.1 J27.10 Q8.X2 U10.74
RC25: J35.38 U13.6
RC26: J35.39 U13.7
RC27: J35.40 U13.8
RC28: J36.1 U13.9
RC29: C85.1 J35.9 Q10.X1 U13.73
RC30: C84.1 J35.10 Q10.X2 U13.74
RC31: J43.38 U16.6
RC32: J43.39 U16.7
RC33: J43.40 U16.8
RC34: J44.1 U16.9
RC35: C102.1 J43.9 Q12.X1 U16.73
RC36: C101.1 J43.10 Q12.X2 U16.74
RD0: J3.8 U1.72
RD1: J3.11 U1.76
RD2: J3.12 U1.77
RD3: J3.13 U1.78
RD4: J3.16 U1.81
RD5: J3.17 U1.82
RD6: J3.18 U1.83
RD7: J3.19 U1.84
RD8: J3.4 U1.68
RD9: J3.5 U1.69
RD10: J3.6 U1.70
RD11: J3.7 U1.71
RD12: J3.14 U1.79
RD13: J3.15 U1.80
RD14: J4.26 U1.47
RD15: J4.27 U1.48
RD16: J12.26 U4.47
RD17: J12.27 U4.48
RD18: J11.4 U4.68
RD19: J11.5 U4.69
RD20: J11.6 U4.70
RD21: J11.7 U4.71
RD22: J11.8 U4.72
RD23: J11.11 U4.76
RD24: J11.12 U4.77
RD25: J11.13 U4.78
RD26: J11.14 U4.79
RD27: J11.15 U4.80
RD28: J11.16 U4.81
RD29: J11.17 U4.82
RD30: J11.18 U4.83
RD31: J11.19 U4.84
RD32: J20.26 U7.47
RD33: J20.27 U7.48
RD34: J19.4 U7.68
RD35: J19.5 U7.69
RD36: J19.6 U7.70
RD37: J19.7 U7.71
RD38: J19.8 U7.72
RD39: J19.11 U7.76
RD40: J19.12 U7.77
RD41: J19.13 U7.78
RD42: J19.14 U7.79
RD43: J19.15 U7.80
RD44: J19.16 U7.81
RD45: J19.17 U7.82
RD46: J19.18 U7.83
RD47: J19.19 U7.84
RD48: J28.26 U10.47
RD49: J28.27 U10.48
RD50: J27.4 U10.68
RD51: J27.5 U10.69
RD52: J27.6 U10.70
RD53: J27.7 U10.71
RD54: J27.8 U10.72
RD55: J27.11 U10.76
RD56: J27.12 U10.77
RD57: J27.13 U10.78
RD58: J27.14 U10.79
RD59: J27.15 U10.80
RD60: J27.16 U10.81
RD61: J27.17 U10.82
RD62: J27.18 U10.83
RD63: J27.19 U10.84
RD64: J36.26 U13.47
RD65: J36.27 U13.48
RD66: J35.4 U13.68
RD67: J35.5 U13.69
RD68: J35.6 U13.70
RD69: J35.7 U13.71
RD70: J35.8 U13.72
RD71: J35.11 U13.76
RD72: J35.12 U13.77
RD73: J35.13 U13.78
RD74: J35.14 U13.79
RD75: J35.15 U13.80
RD76: J35.16 U13.81
RD77: J35.17 U13.82
RD78: J35.18 U13.83
RD79: J35.19 U13.84
RD80: J44.26 U16.47
RD81: J44.27 U16.48
RD82: J43.4 U16.68
RD83: J43.5 U16.69
RD84: J43.6 U16.70
RD85: J43.7 U16.71
RD86: J43.8 U16.72
RD87: J43.11 U16.76
RD88: J43.12 U16.77
RD89: J43.13 U16.78
RD90: J43.14 U16.79
RD91: J43.15 U16.80
RD92: J43.16 U16.81
RD93: J43.17 U16.82
RD94: J43.18 U16.83
RD95: J43.19 U16.84
RE0: J3.26 LED3.C U1.93
RE1: J3.27 LED2.C U1.94
RE2: J3.31 LED1.C U1.98
RE3: J3.32 U1.99 USB.C
RE4: J3.33 U1.100
RE5: J3.35 U1.3
RE6: J3.36 R5.2 U1.4 USER.3 USER.4
RE7: J3.37 PROGRAM.3 PROGRAM.4 R3.2 U1.5
RE8: J4.8 U1.18
RE9: J4.9 U1.19
RE10: J12.9 U4.19
RE11: J12.8 U4.18
RE12: J11.35 U4.3
RE13: J11.36 R20.2 U4.4 USER1.3 USER1.4
RE14: J11.37 PROGRAM1.3 PROGRAM1.4 R19.2 U4.5
RE15: J11.26 LED4.C U4.93
RE16: J11.27 LED5.C U4.94
RE17: J11.31 LED6.C U4.98
RE18: J11.32 U4.99 USB1.C
RE19: J11.33 U4.100
RE20: J20.9 U7.19
RE21: J20.8 U7.18
RE22: J19.35 U7.3
RE23: J19.36 R33.2 U7.4 USER2.3 USER2.4
RE24: J19.37 PROGRAM2.3 PROGRAM2.4 R32.2 U7.5
RE25: J19.26 LED7.C U7.93
RE26: J19.27 LED8.C U7.94
RE27: J19.31 LED9.C U7.98
RE28: J19.32 U7.99 USB2.C
RE29: J19.33 U7.100
RE30: J28.9 U10.19
RE31: J28.8 U10.18
RE32: J27.35 U10.3
RE33: J27.36 R46.2 U10.4 USER3.3 USER3.4
RE34: J27.37 PROGRAM3.3 PROGRAM3.4 R45.2 U10.5
RE35: J27.26 LED10.C U10.93
RE36: J27.27 LED11.C U10.94
RE37: J27.31 LED12.C U10.98
RE38: J27.32 U10.99 USB3.C
RE39: J27.33 U10.100
RE40: J36.9 U13.19
RE41: J36.8 U13.18
RE42: J35.35 U13.3
RE43: J35.36 R59.2 U13.4 USER4.3 USER4.4
RE44: J35.37 PROGRAM4.3 PROGRAM4.4 R58.2 U13.5
RE45: J35.26 LED13.C U13.93
RE46: J35.27 LED14.C U13.94
RE47: J35.31 LED15.C U13.98
RE48: J35.32 U13.99 USB4.C
RE49: J35.33 U13.100
RE50: J44.9 U16.19
RE51: J44.8 U16.18
RE52: J43.35 U16.3
RE53: J43.36 R72.2 U16.4 USER5.3 USER5.4
RE54: J43.37 PROGRAM5.3 PROGRAM5.4 R71.2 U16.5
RE55: J43.26 LED16.C U16.93
RE56: J43.27 LED17.C U16.94
RE57: J43.31 LED18.C U16.98
RE58: J43.32 U16.99 USB5.C
RE59: J43.33 U16.100
RF0: J3.20 U1.87
RF1: J3.21 U1.88
RF2: J4.30 U1.52
RF3: J12.20 U4.39
RF4: J4.28 U1.49
RF5: J4.29 U1.50
RF6: J12.21 U4.40
RF7: J12.28 U4.49
RF8: J4.31 U1.53
RF9: J12.29 U4.50
RF10: J12.30 U4.52
RF11: J12.31 U4.53
RF12: J4.21 U1.40
RF13: J4.20 U1.39
RF14: J11.20 U4.87
RF15: J11.21 U4.88
RF16: J20.20 U7.39
RF17: J20.21 U7.40
RF18: J20.28 U7.49
RF19: J20.29 U7.50
RF20: J20.30 U7.52
RF21: J20.31 U7.53
RF22: J19.20 U7.87
RF23: J19.21 U7.88
RF24: J28.20 U10.39
RF25: J28.21 U10.40
RF26: J28.28 U10.49
RF27: J28.29 U10.50
RF28: J28.30 U10.52
RF29: J28.31 U10.53
RF30: J27.20 U10.87
RF31: J27.21 U10.88
RF32: J36.20 U13.39
RF33: J36.21 U13.40
RF34: J36.28 U13.49
RF35: J36.29 U13.50
RF36: J36.30 U13.52
RF37: J36.31 U13.53
RF38: J35.20 U13.87
RF39: J35.21 U13.88
RF40: J44.20 U16.39
RF41: J44.21 U16.40
RF42: J44.28 U16.49
RF43: J44.29 U16.50
RF44: J44.30 U16.52
RF45: J44.31 U16.53
RF46: J43.20 U16.87
RF47: J43.21 U16.88
RG0: J3.23 U1.90
RG1: J3.22 U1.89
RG2: J11.34 U4.1
RG3: J12.3 U4.11
RG4: J12.2 U4.10
RG5: J12.4 U4.12
RG6: J4.2 U1.10
RG7: J4.3 U1.11
RG8: J4.4 U1.12
RG9: J4.6 U1.14
RG10: J12.6 U4.14
RG11: J11.22 U4.89
RG12: J3.29 U1.96
RG13: J3.30 U1.97
RG14: J3.28 U1.95
RG15: J3.34 U1.1
RG16: J11.23 U4.90
RG17: J11.28 U4.95
RG18: J11.29 U4.96
RG19: J11.30 U4.97
RG20: J19.34 U7.1
RG21: J20.3 U7.11
RG22: J20.2 U7.10
RG23: J20.4 U7.12
RG24: J20.6 U7.14
RG25: J19.22 U7.89
RG26: J19.23 U7.90
RG27: J19.28 U7.95
RG28: J19.29 U7.96
RG29: J19.30 U7.97
RG30: J27.34 U10.1
RG31: J28.3 U10.11
RG32: J28.2 U10.10
RG33: J28.4 U10.12
RG34: J28.6 U10.14
RG35: J27.22 U10.89
RG36: J27.23 U10.90
RG37: J27.28 U10.95
RG38: J27.29 U10.96
RG39: J27.30 U10.97
RG40: J35.34 U13.1
RG41: J36.3 U13.11
RG42: J36.2 U13.10
RG43: J36.4 U13.12
RG44: J36.6 U13.14
RG45: J35.22 U13.89
RG46: J35.23 U13.90
RG47: J35.28 U13.95
RG48: J35.29 U13.96
RG49: J35.30 U13.97
RG50: J43.34 U16.1
RG51: J44.3 U16.11
RG52: J44.2 U16.10
RG53: J44.4 U16.12
RG54: J44.6 U16.14
RG55: J43.22 U16.89
RG56: J43.23 U16.90
RG57: J43.28 U16.95
RG58: J43.29 U16.96
RG59: J43.30 U16.97
USBID: J6.4 J8.ID R9.1 U1.51
USBID1: J9.ID J14.4 R18.1 U4.51
USBID2: J17.ID J22.4 R31.1 U7.51
USBID3: J25.ID J30.4 R44.1 U10.51
USBID4: J33.ID J38.4 R57.1 U13.51
USBID5: J41.ID J46.4 R70.1 U16.51
VBUS: C3.1 J6.1 J7.VBUS J8.VBUS JP1.2 PWR_SEL.3 PWR_SEL.6 U1.54
VBUS1: C30.1 J9.VBUS J14.1 J15.VBUS JP2.2 PWR_SEL1.3 PWR_SEL1.6 U4.54
VBUS2: C47.1 J17.VBUS J22.1 J23.VBUS JP3.2 PWR_SEL2.3 PWR_SEL2.6 U7.54
VBUS3: C64.1 J25.VBUS J30.1 J31.VBUS JP4.2 PWR_SEL3.3 PWR_SEL3.6 U10.54
VBUS4: C81.1 J33.VBUS J38.1 J39.VBUS JP5.2 PWR_SEL4.3 PWR_SEL4.6 U13.54
VBUS5: C98.1 J41.VBUS J46.1 J47.VBUS JP6.2 PWR_SEL5.3 PWR_SEL5.6 U16.54
VIN_RAW: C1.A D1.C U3.3
VIN_RAW1: C26.A D2.C U6.3
VIN_RAW2: C43.A D3.C U9.3
VIN_RAW3: C60.A D4.C U12.3
VIN_RAW4: C77.A D5.C U15.3
VIN_RAW5: C94.A D6.C U18.3
VPP: J4.5 J5.1 R10.2 RESET.3 RESET.4 U1.13
VPP1: J12.5 J13.1 R21.2 RESET1.3 RESET1.4 U4.13
VPP2: J20.5 J21.1 R34.2 RESET2.3 RESET2.4 U7.13
VPP3: J28.5 J29.1 R47.2 RESET3.3 RESET3.4 U10.13
VPP4: J36.5 J37.1 R60.2 RESET4.3 RESET4.4 U13.13
VPP5: J44.5 J45.1 R73.2 RESET5.3 RESET5.4 U16.13

## Tracks (layer width: path | path; a pad name or v marks a point on that pad's centre or on a via)
3.3V  (via drill 0.38)
  Top 0.203: v55.5,24.13 56.43,25.06 U1.86 56.43,28.22 arc-90 C6.1 | v50.55,17.4 50.55,18.16 49.84,18.87 U1.16 43.63,18.87 | v51.37,16.38 51.44,16.38 51.82,16 51.82,14.86 52.43,14.25 U1.30 | U1.2 49.96,24.47 50.29,24.13 50.29,23.37 50.8,22.86 v54.36,22.86 | 55.23,10.78 U1.37 55.23,16.75 56.01,17.53 v56.39,17.53 57.02,16.89 57.02,16.13 58.83,14.33 U1.46 58.83,12.29 59.18,11.94 61.34,11.94 61.59,12.19 C11.1 | U1.62 61.36,19.67 61.34,19.68 57.66,19.68 v57.4,19.43 | U1.55 60.86,16.87 60.45,17.27 59.94,17.27 59.44,17.78 v59.18,17.78
  Top 0.254: v43.56,20.57 43.58,20.56 C9.1 43.56,19.3 43.56,18.8 | 43.56,17.78 C8.1 | 43.56,17.78 43.56,18.8 | 43.56,18.8 43.63,18.87 | 43.56,17.78 43.56,17.14 40.77,14.35 39.88,14.35 R11.2 39.88,14.1 39.24,13.46 36.07,13.46 | 28.45,13.46 32.26,13.46 | 32.26,13.46 36.07,13.46 | 36.07,13.46 R4.2 | 32.26,13.46 R6.2 | 28.45,13.46 R7.2 | R8.2 24.64,13.73 24.91,13.46 28.45,13.46 | C7.1 54.99,10.54 55.23,10.78 | R5.1 R3.1 17.03,19.42 15.75,20.7 15,20.7 R10.1 14.99,20.95 v14.1,21.84 | C13.1 R14.1 76.57,22.13 U2.2 | 79.74,16.89 C10.1 79.76,17.53 78.49,18.8 v75.95,18.8 | R9.2 66.31,12.84 v65.91,12.45
  Top 0.406: J4.38 100.2,11.05 91.44,11.05 90.17,12.32 88.77,12.32 3.3.1 87.12,13.97 87.12,18.67 88.77,20.32 v88.77,21.34 88.77,24.64 v89.79,25.65 | v75.95,18.8 75.06,19.68 U2.2
  Bottom 0.203: 50.55,32.77 50.55,30.86 51.05,30.35 | 53.09,32.77 53.09,30.23
  Bottom 0.254: 96.39,26.29 90.3,26.29 89.79,25.78 v89.79,25.65 | 7.37,9.91 7.37,7.37 9.91,7.37 | 7.37,9.91 7.37,26.42 | 7.37,26.42 7.37,32.77 14.99,32.77 | 14.99,32.77 17.53,32.77 | 17.53,32.77 22.61,32.77 | 22.61,32.77 32.77,32.77 | 32.77,32.77 37.85,32.77 | 37.85,32.77 45.47,32.77 | 45.47,32.77 50.55,32.77 53.09,32.77 55.63,32.77 | 55.63,32.77 60.71,32.77 | 88.65,32.77 102.62,32.77 | 83.57,32.77 88.65,32.77 | 68.33,32.77 83.57,32.77 | 65.79,32.77 68.33,32.77 | 60.71,32.77 65.79,32.77 | 102.62,32.77 117.86,32.77 117.86,7.37 | 9.91,7.37 20.07,7.37 | 20.07,7.37 27.69,7.37 | 27.69,7.37 35.31,7.37 | 35.31,7.37 42.93,7.37 | 42.93,7.37 48.01,7.37 | 48.01,7.37 50.55,7.37 | 50.55,7.37 53.09,7.37 | 53.09,7.37 55.63,7.37 | 55.63,7.37 58.17,7.37 | 58.17,7.37 60.71,7.37 | 60.71,7.37 78.49,7.37 | 78.49,7.37 96.27,7.37 | 96.27,7.37 102.62,7.37 | 102.62,7.37 117.86,7.37 | 7.37,26.42 8.89,26.42 | 7.37,9.91 9.65,9.91 | 9.91,7.37 9.91,10.03 | 48.01,7.37 48.01,9.78 | 55.63,7.37 55.63,9.65 | 60.71,32.77 60.71,30.86 59.82,29.97 | 102.62,32.77 102.62,30.99 | 102.62,7.37 J4.38 | 96.27,7.37 96.27,9.91 | 32.77,32.77 32.77,30.23 | 37.85,32.77 37.85,30.23 | 55.63,32.77 55.63,30.61 | 45.47,32.77 45.47,30.23 46.23,29.46 | 22.61,32.77 22.61,30.23 | 17.53,32.77 17.53,30.23 | 14.99,32.77 14.99,30.23 15.75,29.46 | 20.07,7.37 20.07,9.78 | 27.69,7.37 27.69,9.78 | 35.31,7.37 35.31,9.91 | 42.93,7.37 42.93,9.78 43.05,9.91 | 50.55,7.37 50.55,9.78 | 60.71,7.37 60.71,9.78 | 58.17,7.37 58.17,9.91 | 53.09,7.37 53.09,9.91 | 78.49,7.37 78.49,9.91 | 83.57,32.77 83.57,30.35 | 88.65,32.77 88.65,30.23 | 65.79,32.77 65.79,30.35 | 68.33,32.77 68.33,30.23 | 117.73,11.3 117.73,7.49 117.86,7.37
  Bottom 0.406: 117.73,11.3 117.73,15.62
  pour Bottom (isolate 0.305): 7.37,7.37 7.37,32.77 117.86,32.77 117.86,7.37
3.3V1  (via drill 0.38)
  Top 0.203: v55.5,51.05 56.43,51.98 U4.86 56.43,55.14 arc-90 C20.1 | v50.55,44.32 50.55,45.09 49.84,45.79 U4.16 43.63,45.79 | v51.37,43.31 51.44,43.31 51.82,42.93 51.82,41.78 52.43,41.17 U4.30 | U4.2 49.96,51.39 50.29,51.05 50.29,50.29 50.8,49.78 v54.36,49.78 | 55.23,37.7 U4.37 55.23,43.67 56.01,44.45 v56.39,44.45 57.02,43.81 57.02,43.05 58.83,41.25 U4.46 58.83,39.22 59.18,38.86 61.34,38.86 61.59,39.12 C25.1 | U4.62 61.36,46.59 61.34,46.61 57.66,46.61 v57.4,46.35 | U4.55 60.86,43.79 60.45,44.2 59.94,44.2 59.44,44.7 v59.18,44.7
  Top 0.254: v43.56,47.5 43.58,47.48 C23.1 43.56,46.23 43.56,45.72 | 43.56,44.7 C22.1 | 43.56,44.7 43.56,45.72 | 43.56,45.72 43.63,45.79 | 43.56,44.7 43.56,44.07 40.77,41.27 39.88,41.27 R22.2 39.88,41.02 39.24,40.39 36.07,40.39 | 28.45,40.39 32.26,40.39 | 32.26,40.39 36.07,40.39 | 36.07,40.39 R1.2 | 32.26,40.39 R2.2 | 28.45,40.39 R12.2 | R17.2 24.64,40.66 24.91,40.39 28.45,40.39 | C21.1 54.99,37.47 55.23,37.7 | R20.1 R19.1 17.03,46.34 15.75,47.62 15,47.62 R21.1 14.99,47.88 v14.1,48.77 | C29.1 R24.1 76.57,49.06 U5.2 | 79.74,43.81 C24.1 79.76,44.45 78.49,45.72 v75.95,45.72 | R18.2 66.31,39.77 v65.91,39.37
  Top 0.406: J12.38 100.2,37.97 91.44,37.97 90.17,39.24 88.77,39.24 3.1.1 87.12,40.89 87.12,45.59 88.77,47.24 v88.77,48.26 88.77,51.56 v89.79,52.58 | v75.95,45.72 75.06,46.61 U5.2
  Bottom 0.203: 50.55,59.69 50.55,57.78 51.05,57.28 | 53.09,59.69 53.09,57.15
  Bottom 0.254: 96.39,53.21 90.3,53.21 89.79,52.7 v89.79,52.58 | 7.37,36.83 7.37,34.29 9.91,34.29 | 7.37,36.83 7.37,53.34 | 7.37,53.34 7.37,59.69 14.99,59.69 | 14.99,59.69 17.53,59.69 | 17.53,59.69 22.61,59.69 | 22.61,59.69 32.77,59.69 | 32.77,59.69 37.85,59.69 | 37.85,59.69 45.47,59.69 | 45.47,59.69 50.55,59.69 53.09,59.69 55.63,59.69 | 55.63,59.69 60.71,59.69 | 88.65,59.69 102.62,59.69 | 83.57,59.69 88.65,59.69 | 68.33,59.69 83.57,59.69 | 65.79,59.69 68.33,59.69 | 60.71,59.69 65.79,59.69 | 102.62,59.69 117.86,59.69 117.86,34.29 | 9.91,34.29 20.07,34.29 | 20.07,34.29 27.69,34.29 | 27.69,34.29 35.31,34.29 | 35.31,34.29 42.93,34.29 | 42.93,34.29 48.01,34.29 | 48.01,34.29 50.55,34.29 | 50.55,34.29 53.09,34.29 | 53.09,34.29 55.63,34.29 | 55.63,34.29 58.17,34.29 | 58.17,34.29 60.71,34.29 | 60.71,34.29 78.49,34.29 | 78.49,34.29 96.27,34.29 | 96.27,34.29 102.62,34.29 | 102.62,34.29 117.86,34.29 | 7.37,53.34 8.89,53.34 | 7.37,36.83 9.65,36.83 | 9.91,34.29 9.91,36.96 | 48.01,34.29 48.01,36.7 | 55.63,34.29 55.63,36.58 | 60.71,59.69 60.71,57.78 59.82,56.9 | 102.62,59.69 102.62,57.91 | 102.62,34.29 J12.38 | 96.27,34.29 96.27,36.83 | 32.77,59.69 32.77,57.15 | 37.85,59.69 37.85,57.15 | 55.63,59.69 55.63,57.53 | 45.47,59.69 45.47,57.15 46.23,56.39 | 22.61,59.69 22.61,57.15 | 17.53,59.69 17.53,57.15 | 14.99,59.69 14.99,57.15 15.75,56.39 | 20.07,34.29 20.07,36.7 | 27.69,34.29 27.69,36.7 | 35.31,34.29 35.31,36.83 | 42.93,34.29 42.93,36.7 43.05,36.83 | 50.55,34.29 50.55,36.7 | 60.71,34.29 60.71,36.7 | 58.17,34.29 58.17,36.83 | 53.09,34.29 53.09,36.83 | 78.49,34.29 78.49,36.83 | 83.57,59.69 83.57,57.28 | 88.65,59.69 88.65,57.15 | 65.79,59.69 65.79,57.28 | 68.33,59.69 68.33,57.15 | 117.73,38.23 117.73,34.42 117.86,34.29
  Bottom 0.406: 117.73,38.23 117.73,42.55
  pour Bottom (isolate 0.305): 7.37,34.29 7.37,59.69 117.86,59.69 117.86,34.29
3.3V2  (via drill 0.38)
  Top 0.203: v55.5,77.98 56.43,78.91 U7.86 56.43,82.06 arc-90 C37.1 | v50.55,71.25 50.55,72.01 49.84,72.71 U7.16 43.63,72.71 | v51.37,70.23 51.44,70.23 51.82,69.85 51.82,68.71 52.43,68.1 U7.30 | U7.2 49.96,78.31 50.29,77.98 50.29,77.22 50.8,76.71 v54.36,76.71 | 55.23,64.62 U7.37 55.23,70.59 56.01,71.37 v56.39,71.37 57.02,70.74 57.02,69.98 58.83,68.17 U7.46 58.83,66.14 59.18,65.79 61.34,65.79 61.59,66.04 C42.1 | U7.62 61.36,73.51 61.34,73.53 57.66,73.53 v57.4,73.28 | U7.55 60.86,70.71 60.45,71.12 59.94,71.12 59.44,71.63 v59.18,71.63
  Top 0.254: v43.56,74.42 43.58,74.41 C40.1 43.56,73.15 43.56,72.64 | 43.56,71.63 C39.1 | 43.56,71.63 43.56,72.64 | 43.56,72.64 43.63,72.71 | 43.56,71.63 43.56,70.99 40.77,68.2 39.88,68.2 R35.2 39.88,67.94 39.24,67.31 36.07,67.31 | 28.45,67.31 32.26,67.31 | 32.26,67.31 36.07,67.31 | 36.07,67.31 R27.2 | 32.26,67.31 R28.2 | 28.45,67.31 R29.2 | R30.2 24.64,67.58 24.91,67.31 28.45,67.31 | C38.1 54.99,64.39 55.23,64.62 | R33.1 R32.1 17.03,73.26 15.75,74.55 R34.1 14.99,74.8 v14.1,75.69 | C46.1 R37.1 76.57,75.98 U8.2 | 79.74,70.74 C41.1 79.76,71.37 78.49,72.64 v75.95,72.64 | R31.2 66.31,66.69 v65.91,66.29
  Top 0.406: J20.38 100.2,64.9 91.44,64.9 90.17,66.17 88.77,66.17 3.2.1 87.12,67.82 87.12,72.52 88.77,74.17 v88.77,75.18 88.77,78.49 v89.79,79.5 | v75.95,72.64 75.06,73.53 U8.2
  Bottom 0.203: 50.55,86.61 50.55,84.71 51.05,84.2 | 53.09,86.61 53.09,84.07
  Bottom 0.254: 96.39,80.14 90.3,80.14 89.79,79.63 v89.79,79.5 | 7.37,63.75 7.37,61.21 9.91,61.21 | 7.37,63.75 7.37,80.26 | 7.37,80.26 7.37,86.61 14.99,86.61 | 14.99,86.61 17.53,86.61 | 17.53,86.61 22.61,86.61 | 22.61,86.61 32.77,86.61 | 32.77,86.61 37.85,86.61 | 37.85,86.61 45.47,86.61 | 45.47,86.61 50.55,86.61 53.09,86.61 55.63,86.61 | 55.63,86.61 60.71,86.61 | 88.65,86.61 102.62,86.61 | 83.57,86.61 88.65,86.61 | 68.33,86.61 83.57,86.61 | 65.79,86.61 68.33,86.61 | 60.71,86.61 65.79,86.61 | 102.62,86.61 117.86,86.61 117.86,61.21 | 9.91,61.21 20.07,61.21 | 20.07,61.21 27.69,61.21 | 27.69,61.21 35.31,61.21 | 35.31,61.21 42.93,61.21 | 42.93,61.21 48.01,61.21 | 48.01,61.21 50.55,61.21 | 50.55,61.21 53.09,61.21 | 53.09,61.21 55.63,61.21 | 55.63,61.21 58.17,61.21 | 58.17,61.21 60.71,61.21 | 60.71,61.21 78.49,61.21 | 78.49,61.21 96.27,61.21 | 96.27,61.21 102.62,61.21 | 102.62,61.21 117.86,61.21 | 7.37,80.26 8.89,80.26 | 7.37,63.75 9.65,63.75 | 9.91,61.21 9.91,63.88 | 48.01,61.21 48.01,63.63 | 55.63,61.21 55.63,63.5 | 60.71,86.61 60.71,84.71 59.82,83.82 | 102.62,86.61 102.62,84.84 | 102.62,61.21 J20.38 | 96.27,61.21 96.27,63.75 | 32.77,86.61 32.77,84.07 | 37.85,86.61 37.85,84.07 | 55.63,86.61 55.63,84.45 | 45.47,86.61 45.47,84.07 46.23,83.31 | 22.61,86.61 22.61,84.07 | 17.53,86.61 17.53,84.07 | 14.99,86.61 14.99,84.07 15.75,83.31 | 20.07,61.21 20.07,63.63 | 27.69,61.21 27.69,63.63 | 35.31,61.21 35.31,63.75 | 42.93,61.21 42.93,63.63 43.05,63.75 | 50.55,61.21 50.55,63.63 | 60.71,61.21 60.71,63.63 | 58.17,61.21 58.17,63.75 | 53.09,61.21 53.09,63.75 | 78.49,61.21 78.49,63.75 | 83.57,86.61 83.57,84.2 | 88.65,86.61 88.65,84.07 | 65.79,86.61 65.79,84.2 | 68.33,86.61 68.33,84.07 | 117.73,65.15 117.73,61.34 117.86,61.21
  Bottom 0.406: 117.73,65.15 117.73,69.47
  pour Bottom (isolate 0.305): 7.37,61.21 7.37,86.61 117.86,86.61 117.86,61.21
3.3V3  (via drill 0.38)
  Top 0.203: v171.07,24.13 172,25.06 U10.86 172,28.22 arc-90 C54.1 | v166.12,17.4 166.12,18.16 165.41,18.87 U10.16 159.2,18.87 | v166.94,16.38 167,16.38 167.39,16 167.39,14.86 168,14.25 U10.30 | U10.2 165.53,24.47 165.86,24.13 165.86,23.37 166.37,22.86 v169.93,22.86 | 170.8,10.78 U10.37 170.8,16.75 171.58,17.53 v171.96,17.53 172.59,16.89 172.59,16.13 174.4,14.33 U10.46 174.4,12.29 174.75,11.94 176.91,11.94 177.16,12.19 C59.1 | U10.62 176.93,19.67 176.91,19.68 173.23,19.68 v172.97,19.43 | U10.55 176.43,16.87 176.02,17.27 175.51,17.27 175.01,17.78 v174.75,17.78
  Top 0.254: v159.13,20.57 159.15,20.56 C57.1 159.13,19.3 159.13,18.8 | 159.13,17.78 C56.1 | 159.13,17.78 159.13,18.8 | 159.13,18.8 159.2,18.87 | 159.13,17.78 159.13,17.14 156.34,14.35 155.45,14.35 R48.2 155.45,14.1 154.81,13.46 151.64,13.46 | 144.02,13.46 147.83,13.46 | 147.83,13.46 151.64,13.46 | 151.64,13.46 R40.2 | 147.83,13.46 R41.2 | 144.02,13.46 R42.2 | R43.2 140.21,13.73 140.48,13.46 144.02,13.46 | C55.1 170.56,10.54 170.8,10.78 | R46.1 R45.1 132.6,19.42 131.32,20.7 130.57,20.7 R47.1 130.56,20.95 v129.67,21.84 | C63.1 R50.1 192.14,22.13 U11.2 | 195.31,16.89 C58.1 195.33,17.53 194.06,18.8 v191.52,18.8 | R44.2 181.88,12.84 v181.48,12.45
  Top 0.406: J28.38 215.77,11.05 207.01,11.05 205.74,12.32 204.34,12.32 3.4.1 202.69,13.97 202.69,18.67 204.34,20.32 v204.34,21.34 204.34,24.64 v205.36,25.65 | v191.52,18.8 190.63,19.68 U11.2
  Bottom 0.203: 166.12,32.77 166.12,30.86 166.62,30.35 | 168.66,32.77 168.66,30.23